# EAGLE board v0.8 (EAGLE 9.3.2)
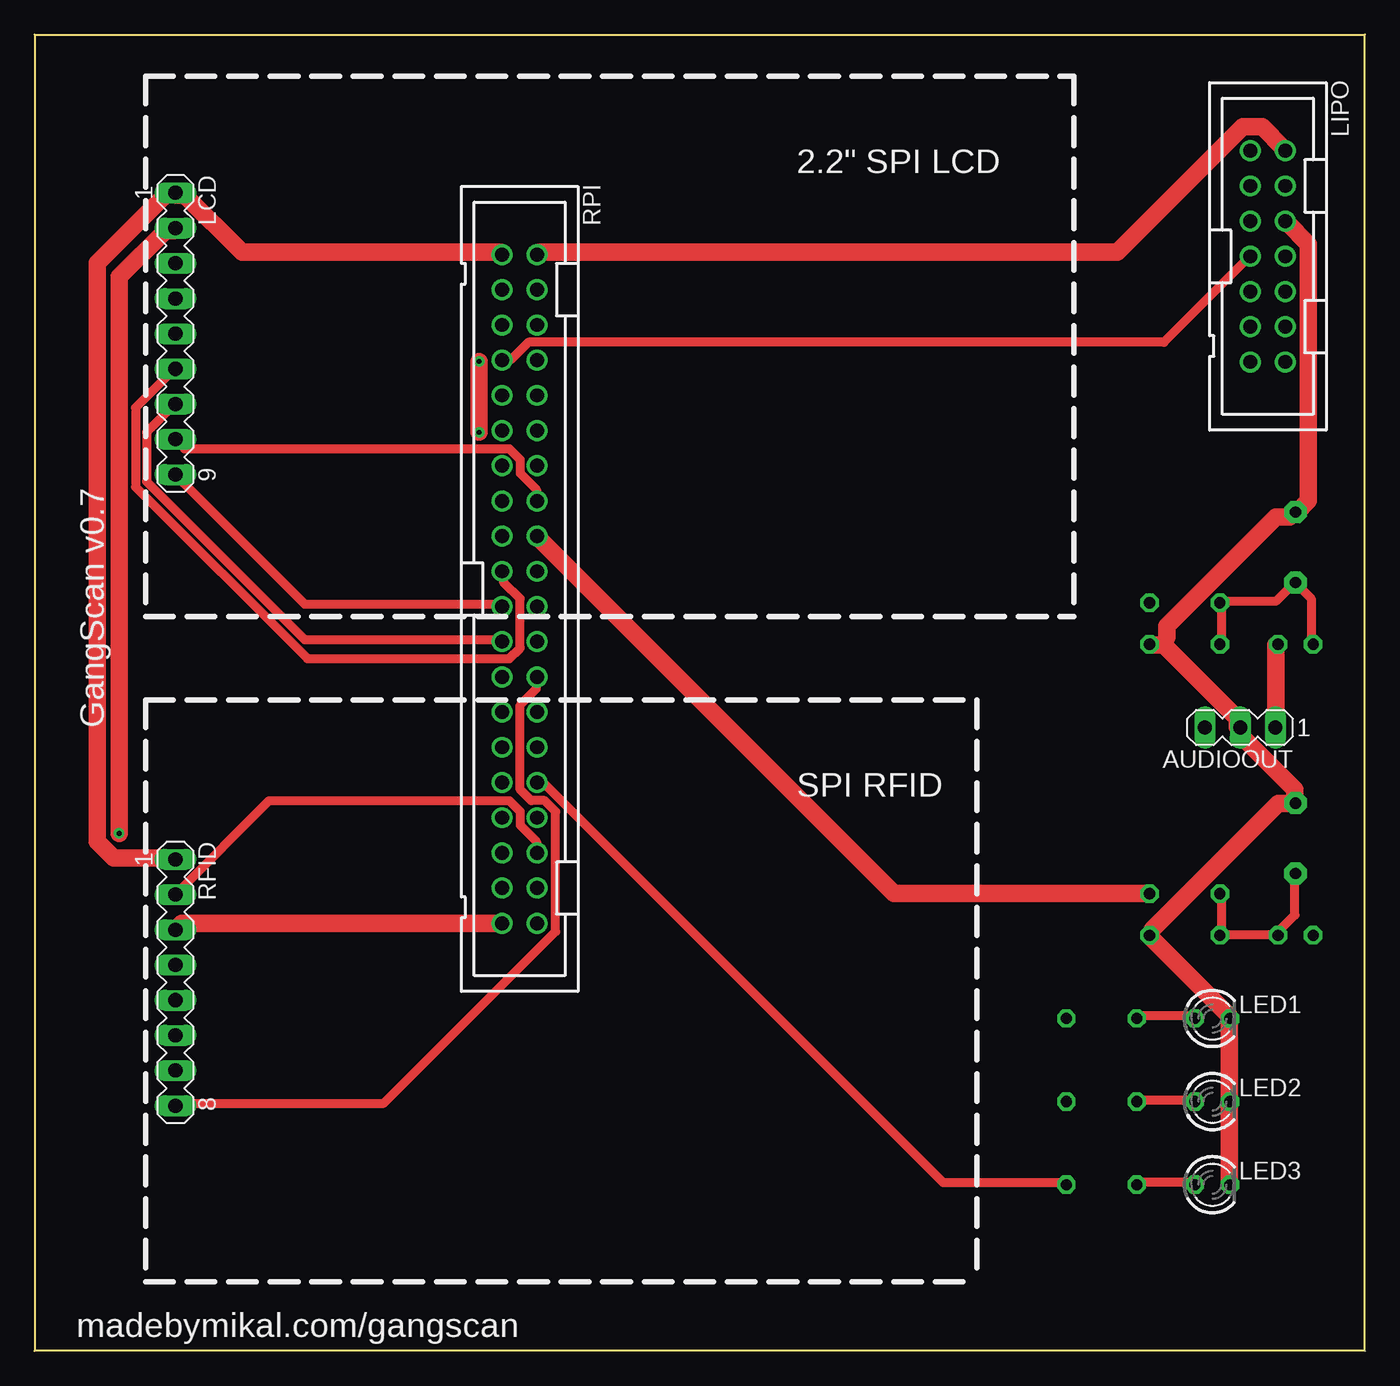
[diagram p0: board, top side]
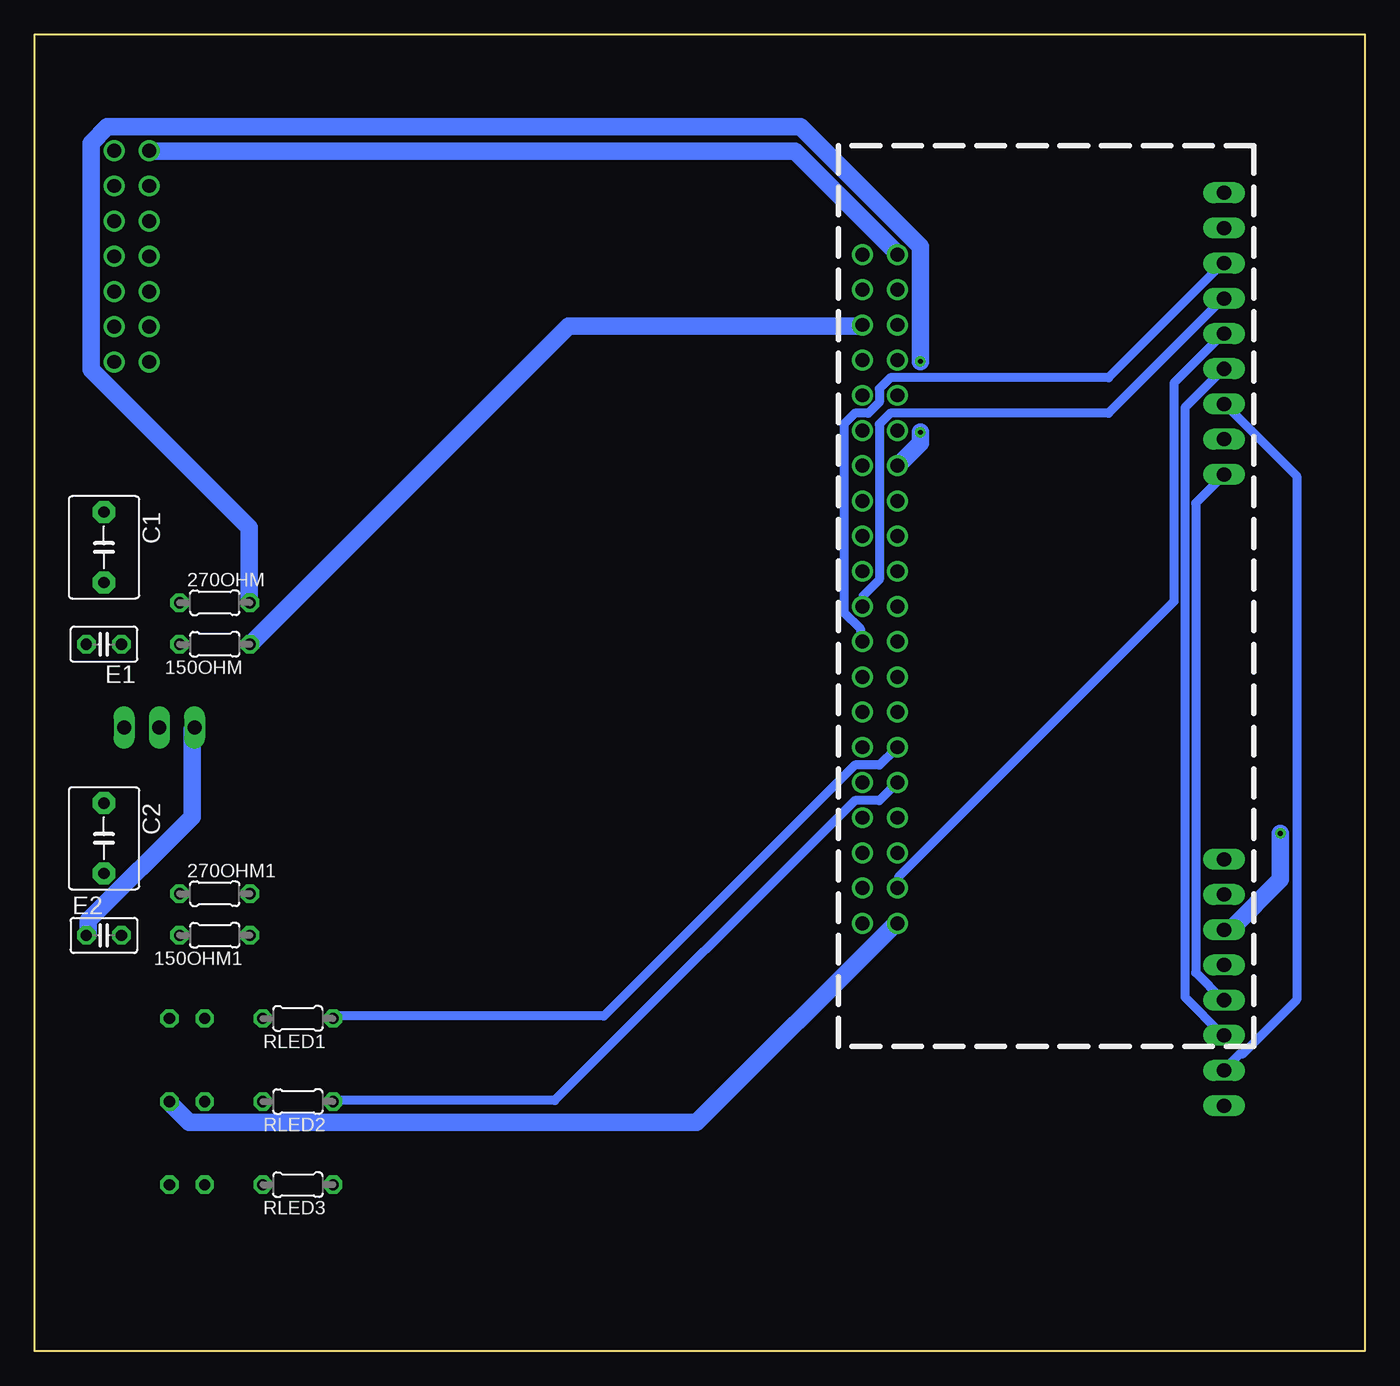
[diagram p1: board, bottom side, seen from below]

Size 96 x 95 mm. Coordinates in mm from the lower left corner, seen from the top.
Outline: 0,95 96,95 96,0 0,0 0,95
Copper layers (1*16): Top 0.035mm / dielectric 1.5mm / Bottom 0.035mm
Design rules "default": minimum track width 6mil, minimum drill 0.35mm, track to track 6mil, track to pad 6mil, pad to pad 6mil, via to via 6mil, smd to smd 6mil, copper to edge 40mil, drill to drill 6mil, minimum pad ring 10mil, minimum via ring 8mil, stop-mask expansion 4mil, vias tented up to drill 0mil, thermal gap 10mil
Net classes: 0 default: width 0.635 mm; 1 ground: width 1.27 mm; 2 vcc: width 1.27 mm; 3 audio: width 1.27 mm

## Footprints (pad centres in the part's own frame; a part is rotated, then mirrored left to right if it is on the bottom)
0204/5 = drill 0.813 octagon: 1 -2.54,0; 2 2.54,0
MA03-1 = drill 1.016 long: 1 -2.54,0; 2 0,0; 3 2.54,0
C5B5 = drill 0.813 pad 1.6 octagon: 1 -2.54,0; 2 2.54,0
C025-025X050 = drill 0.813 octagon: 1 -1.27,0; 2 1.27,0
MA09-1 = drill 1.016 long: 1 -10.16,0; 2 -7.62,0; 3 -5.08,0; 4 -2.54,0; 5 0,0; 6 2.54,0; 7 5.08,0; 8 7.62,0; 9 10.16,0
LED3MM = drill 0.813 octagon: A -1.27,0; K 1.27,0
PAK100/2500-14 = drill 1 pad 1.422: 1 -7.62,-1.27; 2 -7.62,1.27; 3 -5.08,-1.27; 4 -5.08,1.27; 5 -2.54,-1.27; 6 -2.54,1.27; 7 0,-1.27; 8 0,1.27; 9 2.54,-1.27; 10 2.54,1.27; 11 5.08,-1.27; 12 5.08,1.27; 13 7.62,-1.27; 14 7.62,1.27
MA08-1 = drill 1.016 long: 1 -8.89,0; 2 -6.35,0; 3 -3.81,0; 4 -1.27,0; 5 1.27,0; 6 3.81,0; 7 6.35,0; 8 8.89,0
PAK100/2500-40 = drill 1 pad 1.422: 1 -24.13,-1.27; 2 -24.13,1.27; 3 -21.59,-1.27; 4 -21.59,1.27; 5 -19.05,-1.27; 6 -19.05,1.27; 7 -16.51,-1.27; 8 -16.51,1.27; 9 -13.97,-1.27; 10 -13.97,1.27; 11 -11.43,-1.27; 12 -11.43,1.27; 13 -8.89,-1.27; 14 -8.89,1.27; 15 -6.35,-1.27; 16 -6.35,1.27; 17 -3.81,-1.27; 18 -3.81,1.27; 19 -1.27,-1.27; 20 -1.27,1.27; 21 1.27,-1.27; 22 1.27,1.27; 23 3.81,-1.27; 24 3.81,1.27; 25 6.35,-1.27; 26 6.35,1.27; 27 8.89,-1.27; 28 8.89,1.27; 29 11.43,-1.27; 30 11.43,1.27; 31 13.97,-1.27; 32 13.97,1.27; 33 16.51,-1.27; 34 16.51,1.27; 35 19.05,-1.27; 36 19.05,1.27; 37 21.59,-1.27; 38 21.59,1.27; 39 24.13,-1.27; 40 24.13,1.27

## Placement (x,y rotation side)
150OHM  [0204/5]  83,51 180 bottom
150OHM1  [0204/5]  83,30 180 bottom
270OHM  [0204/5]  83,54 0 bottom
270OHM1  [0204/5]  83,33 0 bottom
AUDIOOUT  [MA03-1]  87,45 180 top
C1  33nF  [C5B5]  91,58 270 bottom
C2  33nF  [C5B5]  91,37 270 bottom
E1  1uF  [C025-025X050]  91,51 180 bottom
E2  1uF  [C025-025X050]  91,30 0 bottom
LCD  [MA09-1]  10.16,73.42 270 top
LED1  [LED3MM]  85,24 0 top
LED2  [LED3MM]  85,18 0 top
LED3  [LED3MM]  85,12 0 top
LIPO  2514-  [PAK100/2500-14]  89,79 270 top
RFID  [MA08-1]  10.16,26.59 270 top
RLED1  [0204/5]  77,24 180 bottom
RLED2  [0204/5]  77,18 180 bottom
RLED3  [0204/5]  77,12 180 bottom
RPI  2540-  [PAK100/2500-40]  35,55 270 top

## Library data of the parts
150OHM 150OHM1 270OHM 270OHM1 RLED1-RLED3 = rcl; SPICEPREFIX: R
AUDIOOUT LCD RFID = con-lstb; OC_FARNELL: unknown; OC_NEWARK: unknown
C1 C2 = capacitor-wima
E1 E2 = rcl; SPICEPREFIX: C
LED1-LED3 = led
LIPO RPI = con-3m; OC_FARNELL: unknown; OC_NEWARK: unknown

## Nets
3.3V [vcc]: LCD.1 LIPO.1 RFID.1 RPI.1
5V [vcc]: LIPO.2 RPI.2
AUDIO1 [audio]: 270OHM.2 RPI.13
AUDIO2 [audio]: 270OHM1.2 RPI.18
GND [ground]: 150OHM1.1 150OHM.1 AUDIOOUT.2 C1.1 C2.1 LCD.2 LED1.K LED2.K LED3.K LIPO.6 RFID.3 RPI.6 RPI.39
LCD_DCRS: LCD.5 RPI.37
LCD_LED: LCD.8 RPI.16
LCD_RESET: LCD.4 RPI.22
LOWBAT: LIPO.7 RPI.7
N$1: 150OHM.2 270OHM.1 C1.2 E1.2
N$2: LED2.A RLED2.2
N$3: LED3.A RLED3.2
N$4: RLED1.1 RPI.29
N$5: RLED2.1 RPI.31
N$6: RLED3.1 RPI.32
N$7: 150OHM1.2 270OHM1.1 C2.2 E2.2
N$8 [audio]: AUDIOOUT.1 E1.1
N$9 [audio]: AUDIOOUT.3 E2.1
N$11: LED1.A RLED1.2
RFID_RESET: RFID.2 RPI.36
SPI0_CS0: LCD.3 RPI.24
SPI0_CS1: RFID.8 RPI.26
SPI0_MISO: LCD.9 RFID.5 RPI.21
SPI0_MOSI: LCD.6 RFID.6 RPI.19
SPI0_SCK: LCD.7 RFID.7 RPI.23

## Tracks (layer width: path | path; a pad name or v marks a point on that pad's centre or on a via)
3.3V
  Top 1.27: RPI.1 33.66,79.29 14.96,79.29 10.83,83.42 10.24,83.42 LCD.1 9.65,83.62 4.53,78.5 4.53,36.77 5.71,35.59 10.04,35.59 RFID.1
  Bottom 1.27: LIPO.1 87.6,86.58 41.14,86.58 33.86,79.29 RPI.1
5V
  Top 1.27: RPI.2 36.42,79.29 78.15,79.29 87.2,88.35 88.58,88.35 90.16,86.77 LIPO.2
AUDIO1  (via drill 0.35)
  Top 1.27: v32.09,66.3 v32.09,71.42
  Bottom 1.27: v32.09,71.42 32.09,79.69 40.75,88.35 90.75,88.35 91.93,87.17 91.93,70.83 80.51,59.41 80.51,54.09 270OHM.2 | v32.09,66.3 32.09,65.51 33.66,63.94 RPI.13
AUDIO2
  Top 1.27: 270OHM1.2 80.31,33.03 62.01,33.03 36.42,58.62 RPI.18
GND  (via drill 0.35)
  Top 1.27: RPI.39 33.66,30.87 10.63,30.87 10.24,30.47 RFID.3 | v6.1,37.36 6.1,77.52 9.45,80.87 10.04,80.87 LCD.2 | LED3.K 86.22,12.16 86.22,17.87 LED2.K 86.22,18.46 86.22,23.39 LED1.K 86.22,24.17 80.51,29.88 150OHM1.1 80.71,30.47 89.76,39.53 90.35,39.53 C2.1 90.94,39.72 90.94,40.51 87.01,44.45 AUDIOOUT.2 86.81,45.04 86.81,45.63 81.5,50.95 | LIPO.6 90.35,81.46 91.93,79.88 91.93,61.38 91.14,60.59 C1.1 90.55,60.2 89.57,60.2 81.69,52.32 81.69,51.53 81.5,50.95 | 81.5,50.95 80.51,50.95 150OHM.1
  Bottom 1.27: v6.1,37.36 6.1,34.02 9.65,30.47 10.04,30.47 RFID.3 | RPI.6 36.42,73.98 57.48,73.98 80.31,51.14 150OHM.1 | RPI.39 33.86,30.87 48.23,16.5 84.84,16.5 86.22,17.87 LED2.K
LCD_DCRS
  Bottom 0.635: RPI.37 33.66,33.42 33.66,34.21 13.78,54.09 13.78,69.84 10.24,73.39 LCD.5
LCD_LED
  Top 0.635: RPI.16 36.22,61.38 36.22,62.16 35.04,63.35 35.04,64.33 34.25,65.12 10.83,65.12 10.24,65.71 LCD.8
LCD_RESET
  Bottom 0.635: RPI.22 36.22,53.9 36.22,54.49 35.04,55.67 35.04,66.89 34.25,67.68 18.5,67.68 10.24,75.94 LCD.4
LOWBAT
  Top 0.635: RPI.7 33.86,71.61 34.45,71.61 35.63,72.8 81.5,72.8 87.6,78.9 LIPO.7
N$1
  Top 0.635: 150OHM.2 85.63,51.14 85.63,53.9 270OHM.1 85.83,54.09 89.57,54.09 90.75,55.28 C1.2 91.14,55.28 92.13,54.29 92.13,51.14 E1.2
N$2
  Top 0.635: RLED2.2 79.72,18.07 83.66,18.07 LED2.A
N$3
  Top 0.635: RLED3.2 79.72,12.16 83.66,12.16 LED3.A
N$4
  Bottom 0.635: RLED1.1 74.41,24.17 54.92,24.17 36.81,42.28 35.04,42.28 33.86,43.47 RPI.29
N$5
  Bottom 0.635: RLED2.1 74.41,18.07 58.46,18.07 36.81,39.72 35.04,39.72 33.86,40.91 RPI.31
N$6
  Top 0.635: RLED3.1 74.41,12.16 65.55,12.16 36.81,40.91 36.42,40.91 RPI.32
N$7
  Top 0.635: 270OHM1.1 85.63,32.84 85.63,30.08 150OHM1.2 85.83,30.08 89.57,30.08 E2.2 89.76,30.28 90.94,31.46 90.94,34.41 C2.2
N$8
  Top 1.27: E1.1 89.57,50.95 89.57,45.04 AUDIOOUT.1
N$9
  Bottom 1.27: E2.1 92.13,30.08 92.13,31.06 84.64,38.54 84.64,44.84 AUDIOOUT.3
N$11
  Top 0.635: RLED1.2 79.72,24.17 83.66,24.17 LED1.A
RFID_RESET
  Top 0.635: RPI.36 36.22,35.98 36.22,36.77 35.04,37.95 35.04,38.94 34.25,39.72 16.93,39.72 10.24,33.03 RFID.2
SPI0_CS0
  Bottom 0.635: RPI.24 36.42,51.34 36.42,52.13 37.6,53.31 37.6,66.89 36.81,67.68 35.83,67.68 35.04,68.46 35.04,69.45 34.25,70.24 18.5,70.24 10.24,78.5 LCD.3
SPI0_CS1
  Top 0.635: RPI.26 36.22,48.58 36.22,47.8 35.04,46.61 35.04,40.51 35.83,39.72 36.81,39.72 37.6,38.94 37.6,30.28 25.2,17.87 10.24,17.87 RFID.8
SPI0_MISO
  Top 0.635: RPI.21 33.66,53.9 19.49,53.9 10.24,63.15 LCD.9
  Bottom 0.635: RFID.5 10.24,25.35 12.21,27.32 12.21,61.18 10.24,63.15 LCD.9
SPI0_MOSI
  Top 0.635: RPI.19 33.86,56.26 33.86,55.47 35.04,54.29 35.04,50.75 34.25,49.96 19.68,49.96 7.28,62.36 7.28,68.07 10.04,70.83 LCD.6
  Bottom 0.635: RFID.6 10.24,22.8 12.99,25.55 12.99,68.07 10.24,70.83 LCD.6
SPI0_SCK
  Top 0.635: RPI.23 33.66,51.34 19.49,51.34 8.07,62.76 8.07,66.3 10.04,68.27 LCD.7
  Bottom 0.635: RFID.7 10.04,20.43 9.05,21.42 8.86,21.42 4.92,25.35 4.92,63.15 10.04,68.27 LCD.7

## Text on the board
tPlace: 2.2" SPI LCD | GangScan v0.7 | SPI RFID | madebymikal.com/gangscan